# Altium PCB PCB1.PcbDoc
Units mil, origin at the board's own origin, x right, y up, seen from the top; angles counter-clockwise.
Board outline 6000 x 4000 mil, 2 copper layers (Top Layer, Bottom Layer); 13 components, 10 nets, 79 pads, 0 vias.
Unrouted connection lines stored in the file: 22.
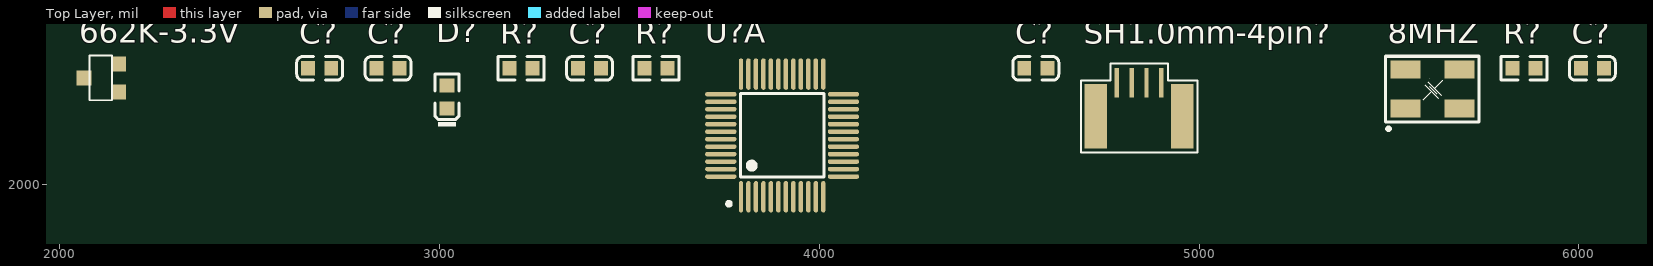
[diagram p0: Top Layer view]
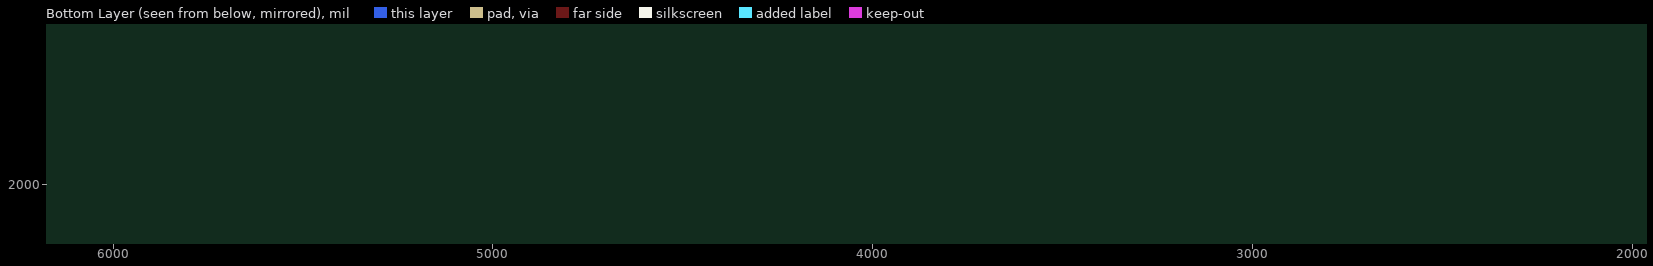
[diagram p1: Bottom Layer view, seen from below]

## Layer stack, top to bottom
Top Solder: solder mask 0.4, Solder Resist, Dk 3.5
Top Layer: signal copper 1.4
Dielectric 1: dielectric 12.6, FR-4, Dk 4.8
Bottom Layer: signal copper 1.4
Bottom Solder: solder mask 0.4, Solder Resist, Dk 3.5

## Board outline
1000,1000 7000,1000 7000,5000 1000,5000

## Design rules (kind name [scope] priority, off if disabled: settings)
Clearance [All] p1: gap=10 ignorepadtopadclearanceinfootprint=FALSE except(0: Arc-Hole Track-Hole SMDPad-Hole THPad-Hole Via-Hole Fill-Hole Poly-Hole Region-Hole Text-Hole)
PolygonConnect [All] p1: connectstyle=Relief reliefconductorwidth=10 reliefentries=4 polygonreliefangle="90 Angle" airgapwidth=10
RoomDefinition rotor [InComponentClass('rotor')] p1: confinementstyle=ConfineIn formatcopy=TRUE lockcomponents=FALSE outline 2035.32,1910 6550.31,1910 6550.31,2450 2035.32,2450
RoutingVias [All] p1: holewidth=28 width=50 viastyle="Through Hole" minholewidth=28 minwidth=50 maxholewidth=28 maxwidth=50
SolderMaskExpansion [All] p1: expansion=4 istentingtop=FALSE
Width [All] p1: maxlimit=10 minlimit=10 preferedwidth=10
30 further rules are at their usual default settings.

## Classes and differential pairs
component class rotor: 8MHZ 662K-3.3V C? D? R? SH1.0mm-4pin? U?A

## Components (designator, comment, footprint, x,y, rotation, side; value= is the part's Value field where it differs from the comment)
8MHZ "5032-8MHZ" 5032-8MHZ 5605.31,2265 r0 top
662K-3.3V "662K-3.3V(SOT-23-3)" SOT-23-3 2120.32,2265 r90 top
C? "100nF (104) 10% 50V" 0603_C 2865.32,2305 r0 top
C? "22pF (220) 5% 50V" 0603_C 6035.31,2305 r0 top
C? "10uF (106) 10% 10V" 0603_C 3395.32,2305 r0 top
C? "22pF (220) 5% 50V" 0603_C 4570.31,2305 r0 top
C? "100nF (104) 10% 50V" 0603_C 2685.32,2305 r0 top
D? "红灯 0603" 0603_LED_S1 3020.32,2230 r90 top
R? "10KΩ (1002) ±1%" 0603_R 3570.32,2305 r0 top
R? "1MΩ (1004) ±1%" 0603_R 5855.31,2305 r0 top
R? "330Ω (3300) ±1%" 0603_R 3215.32,2305 r0 top
SH1.0mm-4pin? "SH1.0mm-4PIN" SH1.0mm-4PIN 4845.31,2200 r90 top
U?A "STM32F103C8T6" STM32F103C8T6 3945.32,2125 r90 top

## Footprints (in the part's own frame and the unit in brackets; to place one, negate y for a bottom-side part, rotate by r counter-clockwise, add the part's x,y. Pads: shape width x height; smd on the part's side, far side on the other; paste and mask are expansions set on the pad)
0603_C [mm]
  rect 0.93x0.98 smd: 1(-0.77,0) 2(0.77,0)
  silkscreen extent -1.53,-0.79 1.54,0.79, body extent -0.8,-0.4 0.8,0.4, height 0.3
0603_LED_S1 [mm]
  rect 0.93x0.98 smd: A(0.77,0) K(-0.77,0)
  silkscreen extent -1.98,-0.79 1.54,0.79, body extent -0.8,-0.4 0.8,0.4, height 0.6
0603_R [mm]
  rect 0.93x0.98 smd: 1(-0.77,0) 2(0.77,0)
  silkscreen extent -1.53,-0.79 1.54,0.79, body extent -0.85,-0.4 0.85,0.4, height 0.56
5032-8MHZ [mm]
  rect 2x1.2 smd: 1(-1.568,-1.667) 2(2.032,-1.667) 3(2.032,0.933) 4(-1.568,0.933)
  silkscreen extent -2.9,-3.11 3.35,1.83, body extent -2.37,-2.08 2.83,1.32, height 1
SH1.0mm-4PIN [mm]
  rect 2x0.3 smd: 1(1.71,1.584) 2(1.71,0.584) 3(1.71,-0.416) 4(1.71,-1.416)
  rect 4.3x1.5 smd: 8(-0.533,2.972) 8(-0.533,-2.819)
  silkscreen extent -2.95,-3.84 2.98,3.96
SOT-23-3 [mil]
  rect 39.37x39.37 smd: 1(-22,-36) 2(52,-36) 3(15,55)
  silkscreen extent -44,-18 74,41, body extent -44,-45 70,65, height 47
STM32F103C8T6 [mm]
  oval 2.1x0.3 smd: 1(-4.008,3.836) 2(-4.008,3.336) 3(-4.008,2.836) 4(-4.008,2.336) 5(-4.008,1.836) 6(-4.008,1.336) 7(-4.008,0.836) 8(-4.008,0.336) 9(-4.008,-0.164) 10(-4.008,-0.664) 11(-4.008,-1.164) 12(-4.008,-1.664) 25(4.192,-1.664) 26(4.192,-1.164) 27(4.192,-0.664) 28(4.192,-0.164) 29(4.192,0.336) 30(4.192,0.836) 31(4.192,1.336) 32(4.192,1.836) 33(4.192,2.336) 34(4.192,2.836) 35(4.192,3.336) 36(4.192,3.836)
  oval 0.3x2.1 smd: 13(-2.658,-3.014) 14(-2.158,-3.014) 15(-1.658,-3.014) 16(-1.158,-3.014) 17(-0.658,-3.014) 18(-0.158,-3.014) 19(0.342,-3.014) 20(0.842,-3.014) 21(1.342,-3.014) 22(1.842,-3.014) 23(2.342,-3.014) 24(2.842,-3.014) 37(2.842,5.186) 38(2.342,5.186) 39(1.842,5.186) 40(1.342,5.186) 41(0.842,5.186) 42(0.342,5.186) 43(-0.158,5.186) 44(-0.658,5.186) 45(-1.158,5.186) 46(-1.658,5.186) 47(-2.158,5.186) 48(-2.658,5.186)
  silkscreen extent -4.6,-1.71 2.89,4.77, body extent -4.41,-3.41 4.59,5.59, height 1.45

## Part data
C? C?: library part "0603 100nF (104) 10% 50V", "贴片电容", Package=0603, SuppliersPartNumber=C14663, ComponentLink1Description=供应商链接, ComponentLink1URL=http://www.szlcsc.com/product/details_15331.html, Supplier=LC
C? C?: library part "0603 22pF (220) 5% 50V", "贴片电容", Package=0603, SuppliersPartNumber=C1653, ComponentLink1Description=供应商链接, ComponentLink1URL=http://www.szlcsc.com/product/details_2005.html, Supplier=LC
C?: library part "0603 10uF (106) 10% 10V", "贴片电容", Package=0603, SuppliersPartNumber=C19702, ComponentLink1Description=供应商链接, ComponentLink1URL=http://www.szlcsc.com/product/details_20411.html, Supplier=LC
D?: library part "0603 红灯", "发光二极管", Package=0603, SuppliersPartNumber=C2286, ComponentLink1Description=供应商链接, ComponentLink1URL=http://www.szlcsc.com/product/details_2659.html, Supplier=LC
R?: library part "0603 10KΩ (1002) 1%", "贴片电阻", Package=0603, SuppliersPartNumber=C25804, ComponentLink1Description=供应商链接, ComponentLink1URL=http://www.szlcsc.com/product/details_26547.html, Supplier=LC
R?: library part "0603 1MΩ (1004) 1%", "贴片电阻", Package=0603, SuppliersPartNumber=C22935, ComponentLink1Description=供应商链接, ComponentLink1URL=http://www.szlcsc.com/product/details_23662.html, Supplier=LC
R?: library part "0603 330Ω (3300) 1%", "贴片电阻", Package=0603, SuppliersPartNumber=C23138, ComponentLink1Description=供应商链接, ComponentLink1URL=http://www.szlcsc.com/product/details_23865.html, Supplier=LC

## Nets (pads, with @x,y where several pads share a name; then routed paths per layer and width w, separated by ;. In a path a pad name is that pad's centre, name@x,y a point inside that pad or via, vN(x,y) a via of type N, cw(c..) or ccw(c..) an arc to the next point about the centre after c; other vN are vias at no path point)
+3.3V: 662K-3.3V.2 C?.2@2895.63,2305 R?.2@3245.63,2305 R?.2@3600.63,2305 SH1.0mm-4pin?.1
+5: 662K-3.3V.3 C?.2@2715.63,2305
GND: 662K-3.3V.1 C?.1 D?.K SH1.0mm-4pin?.4
Net8MHZ_1: 8MHZ.1 C?.2@4600.63,2305 R?.1@5825,2305
NetD?_A: D?.A R?.1@3185,2305
OSC_IN: 8MHZ.3 C?.2@6065.63,2305 R?.2@5885.63,2305 U?A.5
OSC_OUT: U?A.6
RST: C?.2@3425.63,2305 R?.1@3540,2305 U?A.7
SWCLK: SH1.0mm-4pin?.3 U?A.37
SWDIO: SH1.0mm-4pin?.2 U?A.34
pads on no net: 8MHZ.2 8MHZ.4 SH1.0mm-4pin?.8 U?A.1 U?A.2 U?A.3 U?A.4 U?A.8 U?A.9 U?A.10 U?A.11 U?A.12 U?A.13 U?A.14 U?A.15 U?A.16 U?A.17 U?A.18 U?A.19 U?A.20 U?A.21 U?A.22 U?A.23 U?A.24 U?A.25 U?A.26 U?A.27 U?A.28 U?A.29 U?A.30 U?A.31 U?A.32 U?A.33 U?A.35 U?A.36 U?A.38 U?A.39 U?A.40 U?A.41 U?A.42 U?A.43 U?A.44 U?A.45 U?A.46 U?A.47 U?A.48